# Altium PCB GALX4-0047N_PCB-1109N_REV-A.PcbDoc (part 2 of 2)
Units mil, origin at the board's own origin, x right, y up, seen from the top; angles counter-clockwise.
Board outline 3900 x 7750 mil, 2 copper layers (Top, Bottom), stack 64.8 mil thick; 240 components, 158 nets, 844 pads, 146 vias.
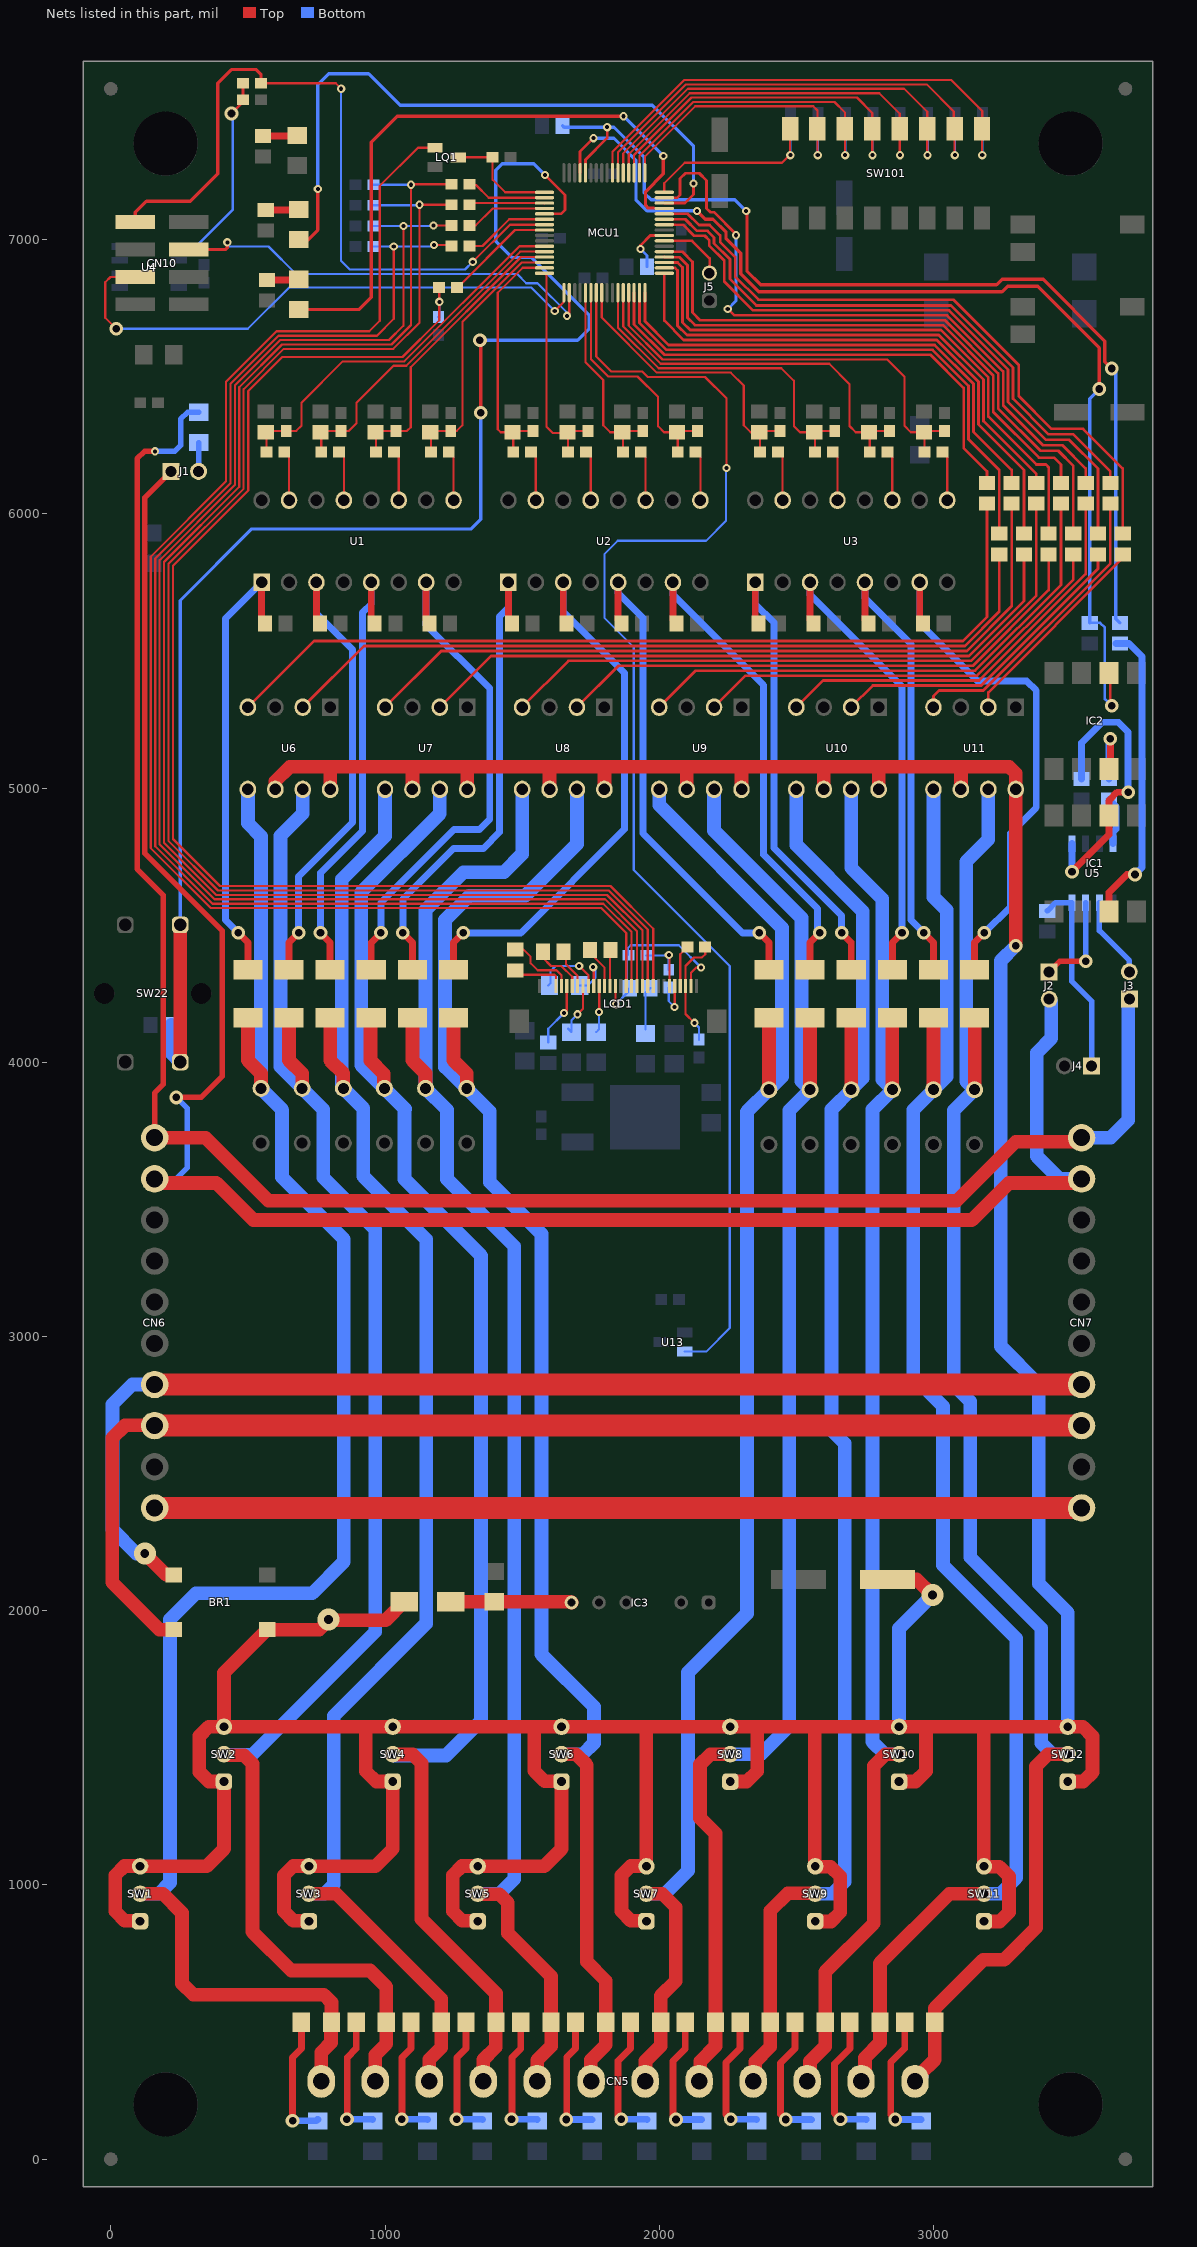
[diagram p2: the nets of this part, all layers, seen from the top]

## Via types
v1: diameter 30, hole 15, Top to Bottom, tented both sides, 81 vias
v2: diameter 50, hole 28, Top to Bottom, tented both sides, 59 vias
v3: diameter 80, hole 32, Top to Bottom, tented both sides, 6 vias

## Nets (pads, with @x,y where several pads share a name; then routed paths per layer and width w, separated by ;. In a path a pad name is that pad's centre, name@x,y a point inside that pad or via, vN(x,y) a via of type N, cw(c..) or ccw(c..) an arc to the next point about the centre after c; other vN are vias at no path point) (continued)
+24V: BR1.1 C25.1 D3.2 SW1.1 SW1.3 SW2.1 SW2.3 SW3.1 SW3.3 SW4.1 SW4.3 SW5.1 SW5.3 SW6.1 SW6.3 SW7.1 SW7.3 SW8.1 SW8.3 SW9.1 SW9.3 SW10.1 SW10.3 SW11.1 SW11.3 SW12.1 SW12.3 U6.6 U6.8 U7.6 U7.8 U8.6 U8.8 U9.6 U9.8 U10.6 U10.8 U11.6 U11.8 | length 19029.5
  Top w25: SW1.1@105.73,869.27 SW1.1@107,868 ; SW3.1@721.18,869.27 SW3.1@722.45,868 ; SW5.1@1336.64,869.27 SW5.1@1337.91,868 ; SW7.1@1952.09,869.27 SW7.1@1953.36,868 ; SW9.3@2568.82,1068 SW9.3@2570.09,1066.73 ; SW11.3@3184.27,1068 SW11.3@3185.54,1066.73
  Top w50: SW1.1@105.73,869.27 51,869.27 16,904.27 16,1035.55 49.73,1069.27 SW1.3@105.73,1069.27 ; SW1.3@107,1068 349,1068 412.73,1131.73 SW2.1@412.73,1377 358,1377 323,1412 323,1543.27 356.73,1577 SW2.3@412.73,1577 ; U6.6@600,4995 600,5025.06 652.94,5078 799,5078 ; SW3.1@721.18,869.27 666.45,869.27 631.45,904.27 631.45,1035.55 665.18,1069.27 SW3.3@721.18,1069.27 ; SW3.3@722.45,1068 964.45,1068 1028.18,1131.73 SW4.1@1028.18,1377 968,1377 930,1415 930,1577 ; U6.8@800,4995 800,5077 799,5078 ; D3.2@1070,2033 1002,1965 794,1965 760,1931 BR1.1@570,1931 412.73,1773.73 SW2.3@412.73,1577 ; U7.6@1100,4995 1100,5076 1098,5078 ; U7.8@1300,4995 1300,5074 1296,5078 ; SW5.1@1336.64,869.27 1281.91,869.27 1246.91,904.27 1246.91,1035.55 1280.64,1069.27 SW5.3@1336.64,1069.27 ; SW5.3@1337.91,1068 1579.91,1068 1643.64,1131.73 SW6.1@1643.64,1377 ; 1544.18,1573 1544.18,1416.27 1582.18,1378.27 SW6.1@1642.36,1378.27 ; U8.6@1600,4995 1600,5078 ; U8.8@1800,4995 1800,5077 1799,5078 ; SW7.1@1952.09,869.27 1897.36,869.27 1862.36,904.27 1862.36,1035.55 1896.09,1069.27 SW7.3@1952.09,1069.27 ; SW7.3@1952.09,1068 1952.09,1577 ; U9.6@2100,4995 2100,5074 2096,5078 ; SW8.1@2259.09,1377 2319.27,1377 2357.27,1415 2357.27,1571.73 ; U9.8@2300,4995 2300,5072 2294,5078 ; SW9.3@2567.54,1068 2567.54,1577 ; SW9.1@2570.09,866.73 2626.09,866.73 2659.82,900.45 2659.82,1031.73 2624.82,1066.73 SW9.3@2570.09,1066.73 ; U10.6@2600,4995 2600,5076 2598,5078 ; U10.8@2800,4995 2800,5077 2799,5078 ; C25.1@2832.5,2114 2939,2114 v3(2996,2057) ; SW10.1@2874.54,1377 2934.73,1377 2972.73,1415 2972.73,1571.73 ; U11.6@3099,4994 U11.6@3100,4995 3100,5074 3096,5078 ; SW11.3@3183,1068 3183,1574 ; SW11.1@3185.54,866.73 3241.54,866.73 3275.27,900.45 3275.27,1031.73 3240.27,1066.73 SW11.3@3185.54,1066.73 ; v2(3300,4425) U11.8@3300,4995 3300,5054 3276,5078 3096,5078 ; SW12.1@3490,1377 3546,1377 3579.73,1410.73 3579.73,1542 3544.73,1577 SW12.3@3490,1577 SW10.3@2874.54,1577 2567.54,1577 ; SW2.3@412.73,1577 930,1577 ; 799,5078 1098,5078 ; 930,1577 SW4.3@1028.18,1577 SW6.3@1643.64,1577 1952.09,1577 ; 1098,5078 1296,5078 ; 1296,5078 1600,5078 ; 1600,5078 1799,5078 ; 1799,5078 2096,5078 ; 1952.09,1577 SW8.3@2259.09,1577 2567.54,1577 ; 2096,5078 2294,5078 ; 2294,5078 2598,5078 ; 2598,5078 2799,5078 ; 2799,5078 3096,5078
  Bottom w50: SW10.3@2874.54,1577 2874.54,1935.54 v3(2996,2057) ; v2(3300,4425) 3245,4370 3245,2965 3384,2826 3384,2099 3490,1993 SW12.3@3490,1577
  other v3: 794,1968
CANH: CN6.9 CN7.9 J1.1 J2.2 | length 7261.3
  Top w20: J1.1@220,6155 124,6059 124,4762 406,4480 406,3949 329,3872 v2(239,3872)
  Top w50: CN6.9@145,3560 385,3560 520,3425 3140,3425 3275,3560 CN7.9@3530,3560
  Bottom w20: CN6.9@160,3575 238,3575 278,3615 278,3833 v2(239,3872)
  Bottom w50: J2.2@3422,4230 3430,4222 3430,4088 3377,4035 3377,3657 3459,3575 CN7.9@3540,3575
CANL: CN6.10 CN7.10 J3.1 R95.1 | length 7093.2
  Top w20: CN6.10@160,3725 160,3888 192,3920 192,4609 96,4705 96,6201 123,6228 v1(161,6228)
  Top w50: CN6.10@160,3725 345,3725 575,3495 3085,3495 3300,3710 3525,3710 CN7.10@3540,3725
  Bottom w20: v1@165,6232 v1(161,6228) 233,6228 255,6250 255,6345 281,6371 319,6371 R95.1@320,6370
  Bottom w50: CN7.10@3540,3725 3646,3725 3710,3789 J3.1@3710,4230
COMM_STAT: LED9.1 MCU1.45 | length 2293.2
  Top w10: 1980.51,7115 1981.15,7114.36 2017.72,7114.36 MCU1.45@2018.5,7113.58
  Top w12: LED9.1@685,6745 905,6745 950,6790 950,7355 1045,7450 v1(1870,7450) ; 1980.51,7115 1960,7115 1950,7125 1950,7175 2015,7240 v1(2015,7305)
  Bottom w12: v1(1870,7450) v1(2015,7305)
CRX: IC2.6 MCU1.61 R130.1 | length 3965.2
  Top w10: MCU1.61@1711.42,7243.5 1711.42,7321.42 v1(1760,7370) ; IC2.6@3640,5420 3645,5415 3645,5305 v2(3650,5300)
  Top w12: v1(2138,7104) 2168,7074 2196,7074 2243.5,7026.5 2243.5,7003.5 2297,6950 2297,6876 2363,6810 3250,6810 3270,6830 3380,6830 3605,6605 v2(3605,6455)
  Bottom w10: R130.1@3570,5602.5 3607.5,5602.5 3625,5585 3625,5325 v2(3650,5300)
  Bottom w12: v1(1760,7370) 1835,7370 1915,7290 1915,7145 1955,7105 v1@2138,7105 ; R130.1@3570,5602.5 3570,6420 v2(3605,6455)
CTX: MCU1.60 R129.1 R131.1 | length 3774.3
  Top w10: MCU1.60@1731.1,7243.5 1731.1,7291.1 1810,7370 v1(1810,7410)
  Top w12: v1(2317,7104) 2320,7101 2320,6885 2370,6835 3230,6835 3250,6855 3400,6855 3625,6630 3625,6555 v2(3650,6530)
  Bottom w12: R129.1@1647.5,7415 1652.5,7410 v1(1810,7410) 1835,7410 1945,7300 1945,7170 1970,7145 2276,7145 v1(2317,7104) ; v2(3650,6530) 3655,6530 3665,6520 3665,5617.5 R131.1@3680,5602.5
GND: CN6.1 CN7.1 | length 3380
  Top w80: CN6.1@160,2375 CN7.1@3540,2375
IN-L_1: C9.1 MCU1.11 R33.1 R41.1 | length 1420.2
  Top w8: R33.1@567.5,6225 567.5,6295 C9.1@565,6297.5 570,6302.5 R41.1@640,6302.5 676.5,6302.5 696,6322 696,6406 846,6556 1070.49,6556 1490.28,6975.79 MCU1.11@1581.5,6975.79
IN-L_2: C10.1 MCU1.12 R34.1 R42.1 | length 1196.2
  Top w8: R34.1@767.5,6225 C10.1@767.5,6295 ; C10.1@770,6302.5 R42.1@840,6302.5 868.5,6302.5 896,6330 896,6405 1031,6540 1077.12,6540 1493.22,6956.1 MCU1.12@1581.5,6956.1
IN-L_3: C11.1 MCU1.13 R35.1 R43.1 | length 1071.9
  Top w8: R35.1@967.5,6225 C11.1@967.5,6295 ; C11.1@970,6302.5 R43.1@1040,6302.5 1080.5,6302.5 1094,6316 1094,6534.25 1496.16,6936.42 MCU1.13@1581.5,6936.42
IN-L_4: C12.1 MCU1.14 R36.1 R44.1 | length 956.5
  Top w8: R36.1@1167.5,6225 C12.1@1167.5,6295 ; C12.1@1170,6302.5 R44.1@1240,6302.5 1261.5,6302.5 1282,6323 1282,6699.63 1499.1,6916.73 MCU1.14@1581.5,6916.73
IN-L_5: C38.1 MCU1.15 R104.1 R108.1 | length 904.6
  Top w8: C38.1@1465,6297.5 1421.5,6297.5 1411,6308 1411,6806 1502.05,6897.05 MCU1.15@1581.5,6897.05 ; R108.1@1467.5,6225 C38.1@1467.5,6295 ; C38.1@1470,6302.5 R104.1@1540,6302.5
IN-L_6: C39.1 MCU1.16 R105.1 R109.1 | length 790.5
  Top w8: MCU1.16@1581.5,6877.36 1589,6869.86 1589,6318 1612,6295 1667.5,6295 R109.1@1667.5,6225 ; C39.1@1670,6302.5 R105.1@1740,6302.5
IN-L_7: C40.1 MCU1.21 R106.1 R110.1 | length 729.9
  Top w8: MCU1.21@1731.1,6806.5 1731.1,6552.9 1796,6488 1796,6323 1821.5,6297.5 C40.1@1865,6297.5 ; R110.1@1867.5,6225 C40.1@1867.5,6295 ; C40.1@1870,6302.5 R106.1@1940,6302.5
IN-L_8: C41.1 MCU1.22 R107.1 R111.1 | length 869.7
  Top w8: MCU1.22@1750.79,6806.5 1750.79,6564.21 1814,6501 1921,6501 1996,6426 1996,6319 2017.5,6297.5 C41.1@2065,6297.5 ; R111.1@2067.5,6225 C41.1@2067.5,6295 ; C41.1@2070,6302.5 R107.1@2140,6302.5
IN-L_9: C13.1 MCU1.24 R37.1 R45.1 | length 1063.7
  Top w8: MCU1.24@1790,6806.34 MCU1.24@1790.16,6806.5 1790.16,6716.22 1991.37,6515 2261,6515 2308,6468 2308,6323 2333.5,6297.5 C13.1@2365,6297.5 ; R37.1@2367.5,6225 C13.1@2367.5,6295 ; C13.1@2370,6302.5 R45.1@2440,6302.5
IN-L_10: C14.1 MCU1.27 R38.1 R46.1 | length 1237.5
  Top w8: MCU1.27@1849.21,6806.5 1849.21,6679.79 1998,6531 2445,6531 2491,6485 2491,6320 2513.5,6297.5 C14.1@2565,6297.5 ; R38.1@2567.5,6225 C14.1@2567.5,6295 ; C14.1@2570,6302.5 R46.1@2640,6302.5
IN-L_11: C15.1 MCU1.28 R39.1 R47.1 | length 1408.6
  Top w8: MCU1.28@1868.9,6806.5 1868.9,6683.47 2005.37,6547 2620,6547 2694,6473 2694,6320 2716.5,6297.5 C15.1@2765,6297.5 ; R39.1@2767.5,6225 C15.1@2767.5,6295 ; C15.1@2770,6302.5 R47.1@2840,6302.5
IN-L_12: C16.1 MCU1.29 R40.1 R48.1 | length 1602.4
  Top w8: MCU1.29@1888.58,6806.5 1888.58,6686.42 2012,6563 2831,6563 2894,6500 2894,6321 2917.5,6297.5 C16.1@2965,6297.5 ; R40.1@2967.5,6225 C16.1@2967.5,6295 ; C16.1@2970,6302.5 R48.1@3040,6302.5
IO_1: CN5.1 IO1.1 MOV1.1 R1.1 SW1.2 U6.5 | length 6356.1
  Top w50: SW1.2@107,968 190,968 260,898 260,641 301,600 777,600 805,572 IO1.1@805,499 803,497 803,425 767.32,389.32 CN5.1@767.32,284 ; R1.1@500,4162.5 500,4007 548,3959 MOV1.1@548,3905
  Bottom w50: SW1.2@107,968 175,968 216,1009 216,1969 311,2064 735,2064 850,2179 850,3355 624,3581 624,3825 ; U6.5@500,4995 500,4872 548,4824 MOV1.1@548,3905 623,3830
IO_2: CN5.2 IO2.1 MOV2.1 R2.1 SW2.2 U6.7 | length 5927.6
  Top w50: SW2.2@412.73,1477 416.73,1473 486,1473 517,1442 517,829 658,688 945,688 1005,628 IO2.1@1005,499 1005,421 964.17,380.17 CN5.2@964.17,284 ; R2.1@650,4162.5 650,4007 698,3959 MOV2.1@698,3905
  Bottom w50: SW2.2@412.73,1477 414.73,1475 516,1475 964.17,1923.17 964.17,3390.83 775,3580 775,3828 MOV2.1@698,3905 619,3984 619,4826 700,4907 U6.7@700,4995
IO_3: CN5.3 IO3.1 MOV3.1 R3.1 SW3.2 U7.5 | length 5665.5
  Top w50: SW3.2@722.45,968 822,968 1205,585 IO3.1@1205,499 1205,407.3 1161.02,363.32 CN5.3@1161.02,284 ; R3.1@800,4162.5 800,4007 848,3959 MOV3.1@848,3905
  Bottom w50: SW3.2@722.45,968 779,968 813,1002 813,1616 1150,1953 1150,3355 921,3584 921,3832 MOV3.1@848,3905 ; MOV3.1@842,3905 842,4667 1000,4825 U7.5@1000,4995
IO_4: CN5.4 IO4.1 MOV4.1 R4.1 SW4.2 U7.7 | length 5756.3
  Top w50: R4.1@947,4161.5 947,4006 995,3958 MOV4.1@995,3904 ; SW4.2@1028.18,1477 1029.18,1476 1101,1476 1133,1444 1133,876 1405,604 IO4.1@1405,499 1403.68,497.68 1403.68,408 1357.88,362.2 CN5.4@1357.88,284
  Bottom w50: SW4.2@1028.18,1477 1033.18,1472 1223,1472 1350,1599 1350,3295 1071,3574 1071,3825 ; 1073,3830 MOV4.1@998,3905 913,3990 913,4620 1200,4907 U7.7@1200,4995
IO_5: CN5.5 IO5.1 MOV5.1 R116.1 SW5.2 U8.5 | length 5640.3
  Top w25: CN5.5@1567,277 CN5.5@1567,284
  Top w50: R116.1@1100,4162.5 1100,4007 1148,3959 MOV5.1@1148,3905 ; SW5.2@1337.91,968 1339.91,966 1417,966 1448,935 1448,824 1605,667 IO5.1@1605,499 1605.68,498.32 1605.68,412 1554.73,361.05 CN5.5@1554.73,284
  Bottom w50: SW5.2@1337.91,968 1417,968 1471,1022 1471,3329 1226,3574 1226,3827 MOV5.1@1148,3905 1148,4555 1286,4693 1434,4693 1500,4759 U8.5@1500,4995
IO_6: CN5.6 IO6.1 MOV6.1 R117.1 SW6.2 U8.7 | length 5721.8
  Top w50: R117.1@1250,4162.5 1250,4007 1298,3959 MOV6.1@1298,3905 ; SW6.2@1643.64,1477 1696,1477 1736,1437 1736,720 1805,651 IO6.1@1805,499 1805,417 1750,362 CN5.6@1750,308.5
  Bottom w50: 1219,3983 1219,4519 1307,4607 1511,4607 1700,4796 U8.7@1700,4995 ; 1220,3983 MOV6.1@1298,3905 1382,3821 1382,3563 1571,3374 1571,1841 1762,1650 1762,1518 1721,1477 SW6.2@1643.64,1477
IO_7: CN5.7 IO7.1 MOV7.1 R118.1 SW7.2 U9.5 | length 5502.1
  Top w50: CN5.7@1950,309 1950,358 2005,413 IO7.1@2005,499 2005,595 2060,650 2060,919 2011,968 SW7.2@1953.36,968 ; MOV7.1@2400,3900 R118.1@2400,4162.5
  Bottom w50: SW7.2@1953.36,968 2021,968 2105,1052 2105,1775 2320,1990 2320,3820 MOV7.1@2400,3900 2448,3948 2448,4490 2000,4938 U9.5@2000,4995
IO_8: CN5.8 IO8.1 MOV8.1 R119.1 SW8.2 U9.7 | length 5413.8
  Top w50: CN5.8@2150,308.5 2150,357.5 2205,412.5 IO8.1@2205,499 2205,1188 2149,1244 2149,1439 2187,1477 SW8.2@2259.09,1477 ; MOV8.1@2550,3900 R119.1@2550,4162.5
  Bottom w50: U9.7@2200,4995 2200,4845.02 2519,4526.02 2519,3931 MOV8.1@2550,3900 2474,3824 2474,1580 2371,1477 SW8.2@2259.09,1477
IO_9: CN5.9 IO9.1 MOV9.1 R5.1 SW9.2 U10.5 | length 5369.4
  Top w25: SW9.2@2548,970 SW9.2@2566.82,970
  Top w50: CN5.9@2350,309 2350,355 2405,410 IO9.1@2405,499 2405,906 2469,970 SW9.2@2548,970 ; MOV9.1@2700,3900 R5.1@2700,4162.5
  Bottom w50: U10.5@2500,4972 U10.5@2500,4995 2500,4792 2742,4550 2742,3942 MOV9.1@2700,3900 2628,3828 2628,2659 2676,2611 2676,1012 2632,968 SW9.2@2568.82,968
IO_10: CN5.10 IO10.1 MOV10.1 R6.1 SW10.2 U10.7 | length 5274.6
  Top w50: CN5.10@2550,308.5 2550,356 2605,411 IO10.1@2605,499 2605,683 2782,860 2782,1434 2825,1477 SW10.2@2874.54,1477 ; MOV10.1@2850,3900 R6.1@2850,4162.5
  Bottom w50: U10.7@2700,4995 2700,4709 2813,4596 2813,3937 MOV10.1@2850,3900 2778,3828 2778,1522 2823,1477 SW10.2@2874.54,1477
IO_11: CN5.11 IO11.1 MOV11.1 R7.1 SW11.2 U11.5 | length 5512.3
  Top w50: CN5.11@2750,309 2750,370 2805,425 IO11.1@2805,499 2805,715 3058,968 SW11.2@3184.27,968 ; MOV11.1@3000,3900 R7.1@3000,4162.5
  Bottom w50: U11.5@3000,4995 3000,4603 3048,4555 3048,3948 MOV11.1@3000,3900 2926,3826 2926,2855 3035,2746 3035,2166 3302,1899 3302,1026 3244,968 SW11.2@3184.27,968
IO_12: CN5.12 IO12.1 MOV12.1 R8.1 SW12.2 U11.7 | length 5551.2
  Top w50: CN5.12@2950,308.5 3005,363.5 IO12.1@3005,499 3005,551 3181,727 3257,727 3374,844 3374,1433 3418,1477 SW12.2@3490,1477 ; MOV12.1@3150,3900 R8.1@3150,4162.5
  Bottom w50: CN5.12@2949.75,308.25 CN5.12@2956,302 ; U11.7@3200,4995 3200,4812.5 3119,4731.5 3119,3931 MOV12.1@3150,3900 3074,3824 3074,2823 3134,2763 3134,2195 3393,1936 3393,1518 3434,1477 SW12.2@3490,1477
LCD-BUSY: LQ1.2 LR7.1 MCU1.1 | length 414.5
  Top w8: LQ1.2@1267.5,7300 LR7.1@1392.5,7300 1392.5,7218.5 1438.36,7172.64 MCU1.1@1581.5,7172.64
LCD-C\S\1\: LCD1.21 LR3.1 R128.2 | length 5317.9
  Top w8: R128.2@1240.5,7129 R128.2@1242.5,7127 v1(1126,7127) 1126,6697 1030.57,6601.57 631.14,6601.57 484.43,6454.86 484.43,6091.86 210,5817.44 210,4807.56 391.14,4626.43 1815.95,4626.43 1958.27,4484.1 LCD1.21@1958.27,4270
  Bottom w8: LR3.1@957.5,7125 1124,7125 v1(1126,7127)
LCD-CLK: LCD1.19 LR5.1 R124.1 | length 5220.8
  Top w8: v1(1067,7050) 1067,6686 1014.57,6633.57 617.88,6633.57 452.43,6468.12 452.43,6105.12 178,5830.69 178,4794.31 377.88,4594.43 1802.69,4594.43 1918.9,4478.22 LCD1.19@1918.9,4270 ; v1@1178,7052 R124.1@1242.5,7052
  Bottom w8: LR5.1@957.5,7050 v1(1067,7050) 1176,7050 v1(1177,7051)
LCD-D/C\: LCD1.22 LR2.1 R126.1 | length 4835
  Top w8: v1@1197.5,6769.5 R126.1@1197.5,6825 ; v1(1198,6773) 1198,6769 1198,6706.14 1063.86,6572 625,6572 501,6448 501,6085 226.57,5810.57 226.57,4814.43 398,4643 1822,4643 1977.95,4487.05 LCD1.22@1977.95,4270
  Top w10: v1@1197.5,6769.5 v1@1198,6769
  Bottom w8: LR2.1@1198,6720.5 v1(1198,6773)
  Bottom w10: LR2.1@1195,6717.5 LR2.1@1198,6720.5
LCD-R\S\T\: LCD1.20 LR4.1 R127.2 | length 5380.3
  Top w8: R127.2@1242.5,7202 1097,7202 v1(1095,7200) 1095,6688.63 1023.95,6617.57 624.51,6617.57 468.43,6461.49 468.43,6098.49 194,5824.07 194,4800.93 384.51,4610.43 1809.32,4610.43 1938.58,4481.16 LCD1.20@1938.58,4270
  Bottom w8: LR4.1@957.5,7200 v1(1095,7200)
LCD-SDA: LCD1.18 LR6.1 R125.1 | length 5118.4
  Top w8: v1(1032,6975) 1032,6711 970.57,6649.57 611.25,6649.57 436.43,6474.75 436.43,6111.75 162,5837.32 162,4787.68 371.25,4578.43 1796.06,4578.43 1899.21,4475.28 LCD1.18@1899.21,4270 ; v1(1179,6980) 1239.5,6980 R125.1@1242.5,6977
  Bottom w8: LR6.1@957.5,6975 v1(1032,6975) 1174,6975 v1(1179,6980)
MCU_STAT: LED10.1 MCU1.46 | length 2405.5
  Top w10: MCU1.46@2018.5,7133.27 2093.27,7133.27 2125,7165 v1(2125,7205)
  Top w12: LED10.1@685,7000 720,7000 755,7035 v1(755,7185)
  Bottom w12: v1(755,7185) 755,7565 795,7605 940,7605 1055,7490 1975,7490 2125,7340 v1(2125,7205)
NetBR1_3: BR1.3 CN6.4 CN7.4 | length 4313.2
  Top w50: v3(124,2209) 202,2131 BR1.3@230,2131
  Top w80: CN6.4@160,2825 CN7.4@3540,2825
  Bottom w50: v3(124,2209) 93,2209 6,2296 6,2753 78,2825 CN6.4@160,2825
NetBR1_4: BR1.4 CN6.3 CN7.3 | length 4376.5
  Top w50: CN6.3@160,2675 159,2676 52,2676 5,2629 5,2104 178,1931 BR1.4@230,1931
  Top w80: CN6.3@160,2675 CN7.3@3540,2675
NetC53_2: C53.2 D3.1 IC3.6 | length 441.2
  Top w50: D3.1@1240,2033 C53.2@1398,2033 1677,2033 IC3.6@1680,2030
NetIC1_3: IC1.3 R131.2 | length 1112
  Top w25: IC1.3@3640,4550 3640,4620 3705,4685 v2(3735,4685)
  Bottom w25: R131.2@3665,5527.5 R131.2@3680,5527.5 3712.5,5527.5 3760,5480 3760,4710 v2(3735,4685)
NetIC1_6: IC1.6 R132.1 U5.1 | length 1068.9
  Top w25: v2(3505,4695) 3640,4830 IC1.6@3640,4900 3640,4955 3670,4985 v2(3710,4985)
  Bottom w25: v2(3505,4695) U5.1@3505,4797.5 ; R132.1@3540,5032.5 3540,5165 3615,5240 3675,5240 3710,5205 v2(3710,4985)
NetIC2_3: IC2.3 R133.1 | length 261.6
  Top w25: IC2.3@3640,5070 3645,5075 v2(3645,5180)
  Bottom w25: R133.1@3640,5032.5 3640,5175 v2(3645,5180)
NetIO1_2: IO1.2 R65.1 | length 474.6
  Top w25: v2(663,140) 667.5,140 668.5,141 662.5,147 662.5,371.5 695,404 IO1.2@695,499
  Bottom w25: v2(663,140) 748.5,140 754,145.5 R65.1@755,144.5
NetIO2_2: IO2.2 R66.1 | length 462
  Top w25: v2(861,145.5) 862.5,147 862.5,371.5 895,404 IO2.2@895,499
  Bottom w25: v2(861,145.5) 954,145.5 R66.1@955,144.5
NetIO3_2: IO3.2 R67.1 | length 462
  Top w25: v2(1061,145.5) 1062.5,147 1062.5,371.5 1095,404 IO3.2@1095,499
  Bottom w25: v2(1061,145.5) 1154,145.5 R67.1@1155,144.5
NetIO4_2: IO4.2 R68.1 | length 462
  Top w25: v2(1261,145.5) 1262.5,147 1262.5,371.5 1295,404 IO4.2@1295,499
  Bottom w25: v2(1261,145.5) 1354,145.5 R68.1@1355,144.5
NetIO5_2: IO5.2 R69.1 | length 462
  Top w25: v2(1461,145.5) 1462.5,147 1462.5,371.5 1495,404 IO5.2@1495,499
  Bottom w25: v2(1461,145.5) 1554,145.5 R69.1@1555,144.5
NetIO6_2: IO6.2 R70.1 | length 462.5
  Top w25: v2(1661,145) 1662.5,146.5 1662.5,371 1695,403.5 IO6.2@1695,499
  Bottom w25: v2(1661,145) 1754,145 R70.1@1755,144
NetIO7_2: IO7.2 R71.1 | length 471.1
  Top w25: v2(1861,145.5) 1850,156.5 1850,359 1895,404 IO7.2@1895,499
  Bottom w25: v2(1861,145.5) 1954,145.5 R71.1@1955,144.5
NetIO8_2: IO8.2 R72.1 | length 525.7
  Top w25: 2050,258 2050,310 ; v2@2062.5,146.5 v2(2061,145) 2050,156 2050,310 ; IO8.2@2095,499 2095,403.5 2050,358.5 2050,310
  Bottom w25: v2(2061,145) 2154,145 R72.1@2155,144
NetIO9_2: IO9.2 R100.1 | length 478.2
  Top w25: v2@2262.5,147 v2(2261,145.5) 2244,162.5 2244,353 2295,404 IO9.2@2295,499
  Bottom w25: v2(2261,145.5) 2354,145.5 R100.1@2355,144.5
NetIO10_2: IO10.2 R101.1 | length 480.4
  Top w25: v2@2462.5,146.5 v2(2461,145) 2442,164 2442,350.5 2495,403.5 IO10.2@2495,499
  Bottom w25: v2(2461,145) 2554,145 R101.1@2555,144
NetIO11_2: IO11.2 R102.1 | length 482.3
  Top w25: v2@2662.5,147 v2(2661,145.5) 2639,167.5 2639,348 2695,404 IO11.2@2695,499
  Bottom w25: v2(2661,145.5) 2754,145.5 R102.1@2755,144.5
NetIO12_2: IO12.2 R103.1 | length 478.7
  Top w25: v2@2862.5,146.5 v2(2861,145) 2844,162 2844,352.5 2895,403.5 IO12.2@2895,499
  Bottom w25: v2(2861,145) 2954,145 R103.1@2955,144
NetJ1_2: J1.2 R95.2 | length 105
  Bottom w20: J1.2@320,6155 R95.2@320,6260
NetJ2_1: J2.1 U5.7 | length 363.2
  Top w20: J2.1@3422,4330 3460,4368 v2(3555,4368)
  Bottom w20: v2(3555,4368) U5.7@3555,4582.5
NetJ3_2: J3.2 U5.6 | length 297.6
  Bottom w20: U5.6@3605,4582.5 3605,4480 3714,4371 J3.2@3714,4330
NetJ4_1: J4.1 R27.1 U5.8 | length 727.7
  Bottom w20: R27.1@3415,4552.5 3445,4582.5 U5.8@3505,4582.5 3505,4295 3577,4223 J4.1@3577,3987
NetJ5_2: J5.2 MCU1.39 | length 245.6
  Top w10: MCU1.39@2018.5,6995.47 2119.53,6995.47 2184,6931 2184,6879 J5.2@2183,6878
NetLC1_1: LC1.1 LR1.2 | length 157.2
  Bottom w8: LC1.1@1950,4120 1950,4252.5 LR1.2@1967.5,4270
NetLC2_1: LC2.1 LC3.2 LCD1.25 | length 260.3
  Top w8: v1(2035,4391) 2037.01,4388.99 LCD1.25@2037.01,4267.98
  Bottom w8: LC2.1@1952.5,4390 2034,4390 v1(2035,4391) LC3.2@2035,4337.5
NetLC2_2: LC2.2 LCD1.15 LCD1.29 LR1.1 | length 689.9
  Top w8: LCD1.15@1840.16,4267.98 1840.16,4213.84 v1(1842,4212) ; LCD1.29@2115.75,4267.98 LCD1.29@2115.75,4277.98 2115.75,4326.75 2135,4346 v1(2152,4346)
  Bottom w8: v1(1842,4212) 1886.4,4256.4 1886.4,4267.98 1882.5,4271.87 1882.5,4390 1885,4392.5 1885,4416 1896,4427 2071,4427 v1(2152,4346)
NetLC3_1: LC3.1 LCD1.26 | length 145.5
  Top w8: v1(2056,4202) 2056.69,4202.69 LCD1.26@2056.69,4267.98
  Bottom w8: LC3.1@2035,4272.5 2035,4223 v1(2056,4202)
NetLC4_1: LC4.1 LC5.1 LCD1.28 | length 404.1
  Top w8: v1(2128.1,4143.9) 2096.06,4175.94 LCD1.28@2096.06,4277.98 2096.06,4351.06 2127,4382 2155.5,4382 2167.5,4394 LC4.1@2167.5,4420
  Bottom w8: v1(2128.1,4143.9) 2145,4127 LC5.1@2145,4082.5
NetLC4_2: LC4.2 LCD1.27 | length 162.8
  Top w8: LCD1.27@2076.38,4267.98 LCD1.27@2076.38,4277.98 2076.38,4393.88 LC4.2@2102.5,4420
NetLC7_1: LC7.1 LCD1.14 | length 117.9
  Top w8: LCD1.14@1820.47,4267.98 1820.47,4382.97 LC7.1@1822.5,4385
NetLC7_2: LC7.2 LCD1.13 | length 136.3
  Top w8: LC7.2@1759,4387 1800.79,4345.21 LCD1.13@1800.79,4267.98
NetLC8_1: LC8.1 LCD1.12 | length 172.6
  Top w8: v1(1780,4183) 1781.1,4184.1 LCD1.12@1781.1,4277.98
  Bottom w8: LC8.1@1770,4110 1780,4120 v1(1780,4183)
NetLC9_1: LC9.1 LCD1.11 | length 221.2
  Top w8: v1(1759,4347) 1761.42,4344.58 LCD1.11@1761.42,4277.98 ; LCD1.11@1761.42,4267.98 LCD1.11@1761.42,4277.98 ; 1761.42,4307.42 LCD1.11@1761.42,4277.98
  Bottom w8: LC9.1@1710,4280 1739,4280 1768,4309 1768,4338 v1(1759,4347)
NetLC9_2: LC9.2 LCD1.10 | length 287.5
  Top w8: v1(1708,4351) 1741.73,4317.27 LCD1.10@1741.73,4277.98 ; LCD1.10@1741.73,4267.98 LCD1.10@1741.73,4277.98 ; LCD1.10@1741.73,4300.27 LCD1.10@1741.73,4277.98
  Bottom w8: LC9.2@1595,4280 1603,4288 1603,4332 1622,4351 v1(1708,4351)
NetLC10_1: LC10.1 LCD1.8 | length 134.4
  Top w8: LC10.1@1660.5,4385 1660.5,4356.5 1702.36,4314.64 LCD1.8@1702.36,4277.98 LCD1.8@1702.36,4267.98
NetLC10_2: LC10.2 LCD1.7 | length 182.9
  Top w8: LC10.2@1573,4383 1573.5,4383 1605,4351.5 1642.87,4351.5 1682.68,4311.7 LCD1.7@1682.68,4277.98 LCD1.7@1682.68,4267.98
NetLC11_1: LC11.1 LCD1.9 | length 193.8
  Top w8: v1(1702,4175) 1722.05,4195.05 LCD1.9@1722.05,4267.98
  Bottom w8: LC11.1@1667,4123 LC11.1@1680,4110 1680,4153 v1(1702,4175)
NetLC12_1: LC12.1 LCD1.5 | length 278.7
  Top w8: LC12.1@1475,4410.5 1505.5,4410.5 1531,4385 1531,4361 1556.5,4335.5 1625,4335.5 1643.31,4317.19 LCD1.5@1643.31,4277.98 LCD1.5@1643.31,4267.98 ; LC12.1@1485,4392.5 LC12.1@1493.5,4392.5
NetLC12_2: LC12.2 LCD1.4 | length 224.1
  Top w8: LC12.2@1475,4335.5 1491,4319.5 1618.37,4319.5 1623.62,4314.25 LCD1.4@1623.62,4277.98 ; LCD1.4@1623.62,4267.98 LCD1.4@1623.62,4277.98 ; LCD1.4@1623.62,4298.38 LCD1.4@1623.62,4277.98
NetLC13_1: LC13.1 LCD1.6 | length 233.6
  Top w8: v1(1653,4180) 1662.99,4189.99 LCD1.6@1662.99,4277.98
  Bottom w8: LC13.1@1595,4072.5 1595,4122 v1(1653,4180)
NetLCD1_17: LCD1.17 LQ1.1 | length 5281.1
  Top w8: LQ1.1@1182.5,7335 1120,7335 981,7196 981,6704 942.57,6665.57 604.63,6665.57 420.43,6481.37 420.43,6118.37 146,5843.95 146,4781.05 364.63,4562.43 1788.57,4562.43 1879.53,4471.47 LCD1.17@1879.53,4277.98 LCD1.17@1879.53,4270
NetLED9_2: LED9.2 R92.1 | length 116
  Top w25: R92.1@570,6852.5 682.5,6852.5 LED9.2@685,6855
NetLED10_2: LED10.2 R93.1 | length 117.5
  Top w25: R93.1@565,7107.5 LED10.2@682.5,7107.5
NetLED11_2: LED11.2 R94.2 | length 126
  Top w20: LED11.2@677.5,7377.5 LED11.2@680,7380
  Top w25: R94.2@555,7377.5 LED11.2@677.5,7377.5
NetMCU1_2: MCU1.2 R127.1 | length 296.8
  Top w8: R127.1@1307.5,7202 1310.5,7199 1332,7199 1378.05,7152.95 MCU1.2@1581.5,7152.95 MCU1.2@1579.72,7154.73
NetMCU1_3: MCU1.3 R128.1 | length 279.1
  Top w8: R128.1@1307.5,7127 1313.77,7133.27 MCU1.3@1581.5,7133.27 MCU1.3@1579.72,7131.49
NetMCU1_4: MCU1.4 R124.2 | length 302
  Top w8: R124.2@1307.5,7052 1331,7052 1392.58,7113.58 MCU1.4@1581.5,7113.58 MCU1.4@1579.72,7111.8
NetMCU1_5: MCU1.5 R134.1 SW22.1 SW22.2 | length 5324.1
  Top w10: MCU1.5@1581.5,7093.9 1641.9,7093.9 1656,7108 1656,7163 v1(1583,7236)
  Top w12: v2(1346,6633) 1349,6630 v2(1349,6369)
  Top w50: SW22.1@253,4001 SW22.2@253,4501
  Bottom w12: SW22.2@253,4501 253,5684 514,5945 1314,5945 1349,5980 v2(1349,6369) ; v2(1346,6633) 1702,6633 1744,6675 1744,6724 1533,6935 1463,6935 1404,6994 1404,7253 1428,7277 1542,7277 v1(1583,7236)
  Bottom w50: R134.1@220.5,4136 220.5,4033.5 SW22.1@253,4001
NetMCU1_6: MCU1.6 R125.2 | length 314.3
  Top w8: R125.2@1307.5,6977 1355.37,6977 1452.59,7074.21 MCU1.6@1581.5,7074.21
NetMCU1_8: MCU1.8 R126.2 | length 405.9
  Top w8: R126.2@1262.5,6825 1264.18,6825 1474.03,7034.84 MCU1.8@1581.5,7034.84
NetMCU1_23: MCU1.23 U13.3 | length 4923
  Top w8: MCU1.23@1770.47,6806.5 1770.47,6573.53 1825,6519 1938,6519 1958,6499 2167,6499 2245,6421 v1(2245,6167)
  Bottom w8: U13.3@2092.5,2945 2171,2945 2257,3031 2257,4351 1907,4701 1907,5514 1800,5621 1800,5853 1849,5902 2171,5902 2243,5974 2243,6165 v1(2245,6167)
NetMCU1_40: MCU1.40 R135.1 | length 191.2
  Top w10: v1@1931,6965 1931,6979 1967.16,7015.16 MCU1.40@2018.5,7015.16
  Bottom w10: v1(1932,6966) 1955.5,6942.5 R135.1@1955.5,6901
NetR1_2: R1.2 R17.1 U1.1 | length 1656.3
  Top w25: v2(465,4472) 500,4437 R1.2@500,4337.5 ; U1.1@550,5750 550,5612.5 R17.1@562.5,5600
  Bottom w25: v2(465,4472) 418,4519 418,5618 U1.1@550,5750
NetR2_2: R2.2 R18.1 U1.3 | length 1700.8
  Top w25: R2.2@650,4337.5 650,4437 v2(685,4472) ; R18.1@750,5612.5 U1.3@750,5750
  Bottom w25: v2(685,4472) 685,4677 882,4874 882,5505 750,5637 U1.3@750,5750
NetR3_2: R3.2 R19.1 U1.5 | length 1651.5
  Top w25: v2(765,4472) 800,4437 R3.2@800,4337.5 ; R19.1@950,5612.5 U1.5@950,5750
  Bottom w25: v2(765,4472) 765,4691 918,4844 918,5640 950,5672 U1.5@950,5750 950,5759 U1.5@949,5760
NetR4_2: R4.2 R20.1 U1.7 | length 1878.9
  Top w25: R4.2@950,4337.5 950,4437 v2(985,4472) ; R20.1@1150,5612.5 U1.7@1150,5750
  Bottom w25: v2(985,4472) 985,4582 1252,4849 1344,4849 1382,4887 1382,5363 1150,5595 U1.7@1150,5750
NetR5_2: R5.2 R21.1 U3.1 | length 1695
  Top w25: R21.1@2350,5612.5 U3.1@2350,5750 ; v2(2665,4472) 2700,4437 R5.2@2700,4337.5
  Bottom w25: U3.1@2350,5750 2350,5672 2418,5604 2418,4782 2665,4535 v2(2665,4472)
NetR6_2: R6.2 R22.1 U3.3 | length 1704.7
  Top w25: R22.1@2550,5612.5 U3.3@2550,5750 ; R6.2@2850,4337.5 2850,4437 v2(2885,4472)
  Bottom w25: U3.3@2549,5749 U3.3@2550,5750 2550,5705 2885,5370 v2(2885,4472)
NetR7_2: R7.2 R23.1 U3.5 | length 1653.6
  Top w25: R23.1@2750,5612.5 U3.5@2750,5750 ; v2(2965,4472) 3000,4437 R7.2@3000,4337.5
  Bottom w25: U3.5@2750,5750 2750,5694 2918,5526 2918,4519 v2(2965,4472)
NetR8_2: R8.2 R24.1 U3.7 | length 1924.7
  Top w25: R24.1@2950,5612.5 U3.7@2950,5750 ; R8.2@3150,4337.5 3150,4437 v2(3185,4472)
  Bottom w25: U3.7@2950,5750 2950,5600 3160,5390 3340,5390 3375,5355 3375,4930 3280,4835 3280,4567 v2(3185,4472)
NetR30_2: R30.2 U10.4 | length 1513.2
  Top w10: U10.4@2500,5295 2597,5392 3166.65,5392 3555,5780.35 R30.2@3555,6037.5
NetR31_2: R31.2 U10.2 | length 1161.7
  Top w10: U10.2@2700,5295 2779,5374 3174.1,5374 3600,5799.9 R31.2@3600,5852.5
NetR32_2: R32.2 U11.4 | length 1104.3
  Top w10: U11.4@3000,5295 3000,5336 3020,5356 3181.56,5356 3645,5819.44 R32.2@3645,6037.5
NetR33_2: R33.2 U1.15 | length 182.2
  Top w8: R33.2@632.5,6225 650,6207.5 U1.15@650,6050
NetR34_2: R34.2 U1.13 | length 157.5
  Top w8: U1.13@850,6050 R34.2@850,6207.5
NetR35_2: R35.2 U1.11 | length 157.5
  Top w8: U1.11@1050,6050 R35.2@1050,6207.5
NetR36_2: R36.2 U1.9 | length 157.5
  Top w8: U1.9@1250,6050 R36.2@1250,6207.5
NetR37_2: R37.2 U3.15 | length 157.5
  Top w8: U3.15@2450,6050 R37.2@2450,6207.5
NetR38_2: R38.2 U3.13 | length 157.5
  Top w8: U3.13@2650,6050 R38.2@2650,6207.5
NetR39_2: R39.2 U3.11 | length 157.5
  Top w8: U3.11@2850,6050 R39.2@2850,6207.5
NetR40_2: R40.2 U3.9 | length 157.5
  Top w8: U3.9@3050,6050 R40.2@3050,6207.5
NetR77_2: R77.2 U11.2 | length 786.5
  Top w10: U11.2@3200,5321 U11.2@3200,5295 3200,5348.99 3690,5838.99 R77.2@3690,5852.5
NetR81_2: R81.2 U6.4 | length 3244.8
  Top w10: U6.4@500,5295 741,5536 3107,5536 3195,5624 R81.2@3195,6037.5
NetR82_2: R82.2 U6.2 | length 2893.3
  Top w10: U6.2@700,5295 923,5518 3114.46,5518 3240,5643.54 R82.2@3240,5852.5
NetR83_2: R83.2 U7.4 | length 2811.9
  Top w10: U7.4@1000,5295 1205,5500 3121.91,5500 3285,5663.09 R83.2@3285,6037.5
NetR84_2: R84.2 U7.2 | length 2526.4
  Top w10: U7.2@1200,5295 1387,5482 3000,5482 ; 2934,5482 3000,5482 ; R84.2@3330,5852.5 3330,5682.63 3129.37,5482 3000,5482
NetR85_2: R85.2 U8.4 | length 2374
  Top w10: U8.4@1500,5295 1669,5464 3136.82,5464 3375,5702.18 R85.2@3375,6032.5
NetR86_2: R86.2 U8.2 | length 2027.5
  Top w10: U8.2@1700,5295 1851,5446 3144.28,5446 3420,5721.72 R86.2@3420,5852.5
NetR87_2: R87.2 U9.4 | length 1946.1
  Top w10: U9.4@2000,5295 2133,5428 3151.73,5428 3465,5741.27 R87.2@3465,6037.5
NetR88_2: R88.2 U9.2 | length 1594.6
  Top w10: U9.2@2200,5295 2315,5410 3159.19,5410 3510,5760.81 R88.2@3510,5852.5
NetR89_1: R89.1 R90.2 U4.1 | length 758.1
  Top w10: v2@455,7450 440,7450 v2(440,7460) 482.5,7502.5 R89.1@482.5,7510 R90.2@482.5,7570
  Bottom w10: U4.1@247.5,6975 310,6975 445,7110 445,7455 v2(440,7460)
NetR108_2: R108.2 U2.15 | length 157.5
  Top w8: U2.15@1550,6050 R108.2@1550,6207.5
NetR109_2: R109.2 U2.13 | length 157.5
  Top w8: U2.13@1750,6050 R109.2@1750,6207.5
NetR110_2: R110.2 U2.11 | length 157.5
  Top w8: U2.11@1950,6050 R110.2@1950,6207.5
NetR111_2: R111.2 U2.9 | length 157.5
  Top w8: U2.9@2150,6050 R111.2@2150,6207.5
NetR112_1: R112.1 R116.2 U2.1 | length 1809.8
  Top w25: v2(1065,4472) 1100,4437 R116.2@1100,4337.5 ; R112.1@1450,5612.5 U2.1@1450,5750
  Bottom w25: v2(1065,4472) 1065,4595 1250,4780 1359,4780 1418,4839 1418,4953 ; 1418,4934 1418,4953 ; 1450,5655 1450,5658 ; U2.1@1450,5750 1450,5658 ; 1418,4953 1418,5626 1450,5658
NetR113_1: R113.1 R117.2 U2.3 | length 2031.9
  Top w25: R117.2@1250,4337.5 1250,4437 v2(1285,4472) ; R113.1@1650,5612.5 U2.3@1650,5750
  Bottom w25: v2(1285,4472) 1495,4472 1873,4850 1873,5419 1650,5642 U2.3@1650,5750 U2.3@1656,5744
NetR114_1: R114.1 R118.2 U2.5 | length 1813.6
  Top w25: R114.1@1850,5612.5 U2.5@1850,5750 ; v2(2365,4472) 2400,4437 R118.2@2400,4337.5
  Bottom w25: U2.5@1850,5750 1850,5712 1941,5621 1941,4835 2304,4472 v2(2365,4472)
NetR115_1: R115.1 R119.2 U2.7 | length 1777.8
  Top w25: R115.1@2050,5612.5 U2.7@2050,5750 ; R119.2@2550,4337.5 2550,4437 v2(2585,4472)
  Bottom w25: U2.7@2050,5750 2050,5705 2380,5375 2380,4757 2577,4560 v2@2577,4477
NetR133_2: R133.2 U5.4 | length 174.5
  Bottom w25: R133.2@3640,4957.5 3665,4932.5 3665,4850 3655,4840 U5.4@3655,4797.5
OUT-L_1: MCU1.30 R81.1 | length 1795.2
  Top w10: MCU1.30@1908.27,6806.5 1908.27,6690.77 2019.04,6580 2989,6580 3110,6459 3110,6240 3195,6155 R81.1@3195,6112.5
OUT-L_2: MCU1.31 R82.1 | length 1990.9
  Top w10: MCU1.31@1927.95,6806.5 1927.95,6696.54 2026.5,6598 2996.9,6598 3128,6466.9 3128,6272 3240,6160 R82.1@3240,5927.5
OUT-L_3: MCU1.32 R83.1 | length 1816.4
  Top w10: MCU1.32@1947.64,6806.5 1947.64,6702.32 2033.95,6616 3004.35,6616 3146,6474.35 3146,6299 3285,6160 R83.1@3285,6112.5
OUT-L_4: MCU1.33 R84.1 | length 2033.7
  Top w10: MCU1.33@2018.5,6877.36 2018.5,6704.5 2089,6634 3011.81,6634 3164,6481.81 3164,6326 3330,6160 R84.1@3330,5927.5
OUT-L_5: MCU1.34 R85.1 | length 1912.4
  Top w10: MCU1.34@2018.5,6897.05 2057.95,6897.05 2067,6888 2067,6686 2101,6652 3019.27,6652 3182,6489.26 3182,6338 3375,6145 R85.1@3375,6112.5 R85.1@3375,6107.5
OUT-L_6: MCU1.35 R86.1 | length 2154.1
  Top w10: MCU1.35@2018.5,6916.73 2067.27,6916.73 2085,6899 2085,6698 2113,6670 2196,6670 3026.72,6670 3200,6496.72 3200,6355 3375,6180 3410,6180 3420,6170 R86.1@3420,5927.5
OUT-L_7: MCU1.36 R87.1 | length 2016.9
  Top w10: MCU1.36@2018.5,6936.42 2019.28,6935.64 2073.82,6935.64 2103,6906.46 2103,6715 2130,6688 3034.18,6688 3218,6504.18 3218,6372 3385,6205 3440,6205 3465,6180 R87.1@3465,6112.5
OUT-L_8: MCU1.37 R88.1 | length 2245.7
  Top w10: MCU1.37@2018.5,6956.1 2083.9,6956.1 2121,6919 2121,6734 2149,6706 3041.63,6706 3236,6511.63 3236,6384 3390,6230 3455,6230 3510,6175 R88.1@3510,5927.5
OUT-L_9: MCU1.47 R30.1 | length 2447
  Top w10: MCU1.47@2018.5,7152.95 2065.95,7152.95 2076,7163 2076,7223 2095,7242 2146,7242 2172,7216 2172,7114 2186,7100 2200,7100 2279,7021 v1@2279,7016 ; v1@2246,6752 2274,6724 3049.09,6724 3254,6519.09 3254,6396 3400,6250 3470,6250 3555,6165 R30.1@3555,6112.5
  Bottom w10: v1(2250,6747) 2280,6777 v1(2280,7016)
OUT-L_10: MCU1.42 R31.1 | length 2313.1
  Top w10: MCU1.42@2018.5,7054.53 2086.47,7054.53 2127,7014 2166,7014 2182,6998 2182,6979 2237,6924 2237,6847 2342,6742 3056.54,6742 3272,6526.54 3272,6408 3410,6270 3495,6270 3600,6165 R31.1@3600,5927.5
OUT-L_11: MCU1.43 R32.1 | length 2171.6
  Top w10: MCU1.43@2018.5,7074.21 2094.79,7074.21 2137,7032 2176,7032 2200,7008 2200,6986.46 2258,6928.46 2258,6856 2354,6760 3064,6760 3290,6534 3290,6420 3420,6290 3510,6290 3645,6155 R32.1@3645,6112.5
OUT-L_12: MCU1.44 R77.1 | length 2415.2
  Top w10: MCU1.44@2018.5,7093.9 2104.1,7093.9 2145,7053 2184,7053 2222,7015 2222,6992 2277,6937 2277,6866 2362,6781 3072.26,6781 3311,6542.26 3311,6429 3430,6310 3545,6310 3690,6165 R77.1@3690,5927.5
PGC: CN10.5 MCU1.17 | length 2047.5
  Top w8: v2(20,6675) -20,6715 -20,6845 -1,6864 CN10.5@89.5,6864 ; v1(1619,6740) MCU1.17@1652.36,6773.36
  Bottom w8: v2(20,6675) 500,6675 650,6825 1534,6825 v1(1619,6740)
PGD: CN10.4 MCU1.18 | length 1623.2
  Top w8: v1(1664,6722) 1672.05,6730.05 MCU1.18@1672.05,6806.5
  Top w12: CN10.4@284.5,6964 419,6964 425,6970 v1(425,6990)
  Bottom w8: v1(425,6990) 425,6970 430,6975 575,6975 675,6875 1481,6875 1515,6841 1556.18,6841 1664,6733.18 v1(1664,6722)
R\E\S\E\T\: CN10.1 MCU1.7 R90.1 | length 2714.2
  Top w8: R90.1@547.5,7560 557.5,7570 820,7570 v1(840,7550) ; v1(1320,6919) 1455.53,7054.53 MCU1.7@1581.5,7054.53
  Top w12: CN10.1@89.5,7064 89.5,7099.5 130,7140 290,7140 390,7240 390,7570 440,7620 530,7620 547.5,7602.5 R90.1@547.5,7570 R90.1@547.5,7560
  Bottom w8: v1@835,7555 v1(840,7550) 840,6922 871,6891 1292,6891 v1(1320,6919)
SW_1: MCU1.48 R96.1 SW101.16 | length 720.6
  Top w8: MCU1.48@2018.5,7172.64 2018.5,7205.5 2093,7280 2448,7280 v1@2477,7309 ; SW101.16@2477,7404 v1@2477,7309 ; v1(2478,7308) v1@2477,7309
  Bottom w8: v1(2478,7308) 2478,7396.5 R96.1@2479,7397.5
SW_2: MCU1.49 R97.1 SW101.15 | length 1024
  Top w8: MCU1.49@1947.64,7243.5 1947.64,7302.64 2131,7486 2562,7486 2577,7471 SW101.15@2577,7404 2577,7309 v1(2578,7308)
  Bottom w8: v1(2578,7308) 2578,7396.5 R97.1@2579,7397.5
SW_3: MCU1.50 R98.1 SW101.14 | length 1154.6
  Top w8: MCU1.50@1927.95,7243.5 1927.95,7305.58 2124.37,7502 2639,7502 2677,7464 SW101.14@2677,7404 2677,7309 v1(2678,7308)
  Bottom w8: v1(2678,7308) 2678,7396.5 R98.1@2679,7397.5
SW_4: MCU1.51 R99.1 SW101.13 | length 1288
  Top w8: MCU1.51@1908.27,7243.5 1908.27,7308.52 2117.75,7518 2721,7518 2777,7462 SW101.13@2777,7404 2777,7309 v1(2778,7308)
  Bottom w8: v1(2778,7308) 2778,7396.5 R99.1@2779,7397.5
SW_5: MCU1.52 R73.1 SW101.12 | length 1419.5
  Top w8: MCU1.52@1888.58,7243.5 1888.58,7311.46 2111.12,7534 2802,7534 2877,7459 SW101.12@2877,7404 2877,7309 v1(2878,7308)
  Bottom w8: v1(2878,7308) R73.1@2878,7396.5
SW_6: MCU1.53 R74.1 SW101.11 | length 1558.3
  Top w8: MCU1.53@1868.9,7243.5 1868.9,7314.41 2104.49,7550 2893,7550 2977,7466 SW101.11@2977,7404 v1@2977,7309
  Bottom w8: v1(2978,7308) 2979,7309 R74.1@2979,7397.5
SW_7: MCU1.54 R75.1 SW101.10 | length 1692.8
  Top w8: MCU1.54@1849.21,7243.5 1849.21,7317.35 2097.86,7566 2975,7566 3074,7467 3074,7407 SW101.10@3077,7404 3077,7309 v1(3078,7308)
  Bottom w8: v1(3078,7308) R75.1@3078,7397.5
SW_8: MCU1.55 R76.1 SW101.9 | length 1830.8
  Top w8: MCU1.55@1829.53,7243.5 1829.53,7320.29 2091.24,7582 3065,7582 3178,7469 3178,7405 SW101.9@3177,7404 3177,7309 v1(3178,7308)
  Bottom w8: v1(3178,7308) R76.1@3178,7396.5
pads on no net: CN5.paste CN10.6 CN10.7 CN10.8 FD0.FD FD1.FD FD2.FD FD3.FD IC1.1 IC1.4 IC1.7 IC2.1 IC2.4 IC2.7 IC3.5 J1.p1 J2.p1 J3.p1 J4.p1 J5.0 J5.1@2183,6878 LCD1.1 LCD1.30 LCD1.31 LCD1.32 MCU1.58 MCU1.59 MCU1.62 MCU1.63 MCU1.64 MTH1.MntHole MTH2.MntHole MTH3.MntHole MTH4.MntHole SW22.5 SW22.6 TX1.10 U4.3 U4.5 U4.6 U4.7 U4.8 U5.5 XU1.1 XU2.1 XU3.1 XU6A.1 XU7.1 XU8.1 XU9.1 XU10.1 XU11.1

## Polygon pours and split planes (outlines as drawn)
0V on Bottom "mask" (solid, remove dead copper, pour order 1001): 0,7550 0,3000 450,3000 450,3550 700,3600 1400,3600 1850,3150 1850,2850 2250,2850 2250,3600 3300,3600 3350,3550 3350,3000 3700,3000 3700,7550
0V on Top "mask" (solid, remove dead copper, pour order 1000): 0,7550 0,3000 400,3000 400,5900 3400,5900 3400,3000 3700,3000 3700,7550

## Keep-outs
Board:
  the board outline again, w10

## Other copper
Bottom:
  text "PCB-1109N" at 1870,7520 h120
  text "BOTTOM" at 3705,7105 h100 r270

## Silkscreen, mask and mechanical layers (free items; w line width, h text height)
Top Silk:
  drawing of 185 lines, arcs and shapes, not listed
  text "+5V" at 810,7255 h90 r90
  text "MCU" at 810,6960 h90 r90
  text "1" at 2505,6925 h90 r90
  text "2" at 2605,6920 h90 r90
  text "8" at 2805,6920 h75 r90
  text "4" at 2705,6915 h90 r90
  text "16" at 2905,6900 h90 r90
  text "32" at 3010,6900 h90 r90
  text "FLIP" at 3105,6875 h75 r90
  text "AUX" at 3195,6870 h75 r90
  text "PIN39" at 2249,6866 h45
  text "0V" at 2160,6681 h45
  text "COMM" at 810,6660 h90 r90
  text "IN1" at 550,6125 h90
  text "IN2" at 750,6125 h90
  text "IN3" at 950,6125 h90
  text "IN4" at 1150,6125 h90
  text "IN5" at 1450,6125 h90
  text "IN6" at 1650,6125 h90
  text "IN7" at 1850,6125 h90
  text "IN8" at 2050,6125 h90
  text "IN9" at 2350,6125 h90
  text "IN10" at 2525,6125 h90
  text "IN11" at 2725,6125 h90
  text "IN12" at 2925,6125 h90
  text "BUS" at 200,6026 h80
  text "TERM" at 172,5962 h80
  text "24V AC/DC I/O EXPANDER" at 76,5037 h120 r90
  text "GALX4-0047N" at 173,5037 h120 r90
  text "REV: A" at 277,5037 h120 r90
  text "L" at 128.63,4921.64 h83.88 r90
  text "A" at 128.63,4823.79 h83.88 r90
  text "G" at 128.63,4732.92 h83.88 r90
  text "www.gal.com" at 257.94,4701.47 h55.92 r90
  text "MADE IN USA" at 315,4679.93 h60 r90
  text "OUT1" at 575,4675 h100 r90
  text "OUT2" at 775,4675 h100 r90
  text "OUT3" at 1075,4675 h100 r90
  text "OUT4" at 1275,4675 h100 r90
  text "OUT5" at 1575,4675 h100 r90
  text "OUT6" at 1775,4675 h100 r90
  text "OUT7" at 2075,4675 h100 r90
  text "OUT8" at 2275,4675 h100 r90
  text "OUT9" at 2575,4675 h100 r90
  text "OUT10" at 2775,4650 h100 r90
  text "OUT11" at 3075,4650 h100 r90
  text "OUT12" at 3275,4650 h100 r90
  text "INFO" at 173,4514 h80 r90
  text "CAN" at 3552,4194 h80 r90
  text "ENABLE" at 3639,4139 h80 r90
  text "RISE" at 3400,3905 h80 r90
  text "HIGH" at 3321,3903 h80 r90
  text "C2L" at 452,3664 h80 r90
  text "C2L" at 3301,3663 h80 r90
  text "C2H" at 382,3550 h80
  text "C2H" at 3204,3548 h65
  text "+5V" at 3196,3401 h80
  text "+5V" at 386,3398 h80
  text "+5V" at 3188,3253 h80
  text "+5V" at 388,3250 h80
  text "0V" at 3218,3109 h80
  text "0V" at 403,3094 h80
  text "0V" at 396,2954 h80
  text "0V" at 3222,2949 h80
  text "24V" at 3204,2845 h65
  text "24V" at 402,2844 h65
  text "AC/DC" at 3194,2784 h45
  text "AC/DC" at 392,2783 h45
  text "24CM" at 3176,2692 h65
  text "24CM" at 374,2691 h65
  text "AC/DC" at 3189,2620 h45
  text "AC/DC" at 387,2619 h45
  text "120V" at 391,2542 h65
  text "120V" at 3183,2537 h65
  text "LINE" at 392,2475 h65
  text "LINE" at 3184,2470 h65
  text "120V" at 386,2386 h65
  text "120V" at 3183,2384 h65
  text "NEUT." at 376,2322 h65
  text "NEUT." at 3173,2320 h65
  text "2" at 439,1701 h100
  text "4" at 1048.07,1701.28 h100
  text "6" at 1657.06,1701 h100
  text "8" at 2266.04,1701 h100
  text "10" at 2875.02,1701 h100
  text "12" at 3484,1701 h100
  text "ON" at 660,1568 h55 r90
  text "ON" at 1274,1568 h55 r90
  text "ON" at 1889,1568 h55 r90
  text "ON" at 2506,1568 h55 r90
  text "ON" at 3121,1568 h55 r90
  text "ON" at 3737,1568 h55 r90
  text "MON." at 658,1319 h55 r90
  text "MON." at 1272,1319 h55 r90
  text "MON." at 1887,1319 h55 r90
  text "MON." at 2504,1319 h55 r90
  text "MON." at 3119,1319 h55 r90
  text "MON." at 3735,1319 h55 r90
  text "3" at 760.8,1186 h100
  text "5" at 1369.6,1186 h100
  text "9" at 2587.2,1186 h100
  text "1" at 152,1184.89 h100
  text "7" at 1978.4,1184.89 h100
  text "11" at 3196,1184.89 h100
  text "ON" at 969,1060 h55 r90
  text "ON" at 1585,1060 h55 r90
  text "ON" at 355,1059 h55 r90
  text "ON" at 2200,1059 h55 r90
  text "ON" at 2815,1059 h55 r90
  text "ON" at 3432,1059 h55 r90
  text "MON." at 967,811 h55 r90
  text "MON." at 1583,811 h55 r90
  text "MON." at 353,810 h55 r90
  text "MON." at 2198,810 h55 r90
  text "MON." at 2813,810 h55 r90
  text "MON." at 3430,810 h55 r90
  text "IN" at 588,102 h60 r30
  text "U1" at 726.65,81 h80
  text "U1" at 923.5,81 h80
  text "U1" at 1120.35,81 h80
  text "U1" at 1317.2,81 h80
  text "U2" at 1514.05,81 h80
  text "U2" at 1710.9,81 h80
  text "U2" at 1907.75,81 h80
  text "U2" at 2104.6,81 h80
  text "U3" at 2301.45,81 h80
  text "U3" at 2498.3,81 h80
  text "U3" at 2695.15,81 h80
  text "U3" at 2892,81 h80
  text "MAP" at 509,11 h55 r90
  text "I/O CHIP" at 455,-42 h55 r90
  text "U6" at 726.65,-44 h80
  text "U6" at 927.05,-44 h80
  text "U7" at 1123.9,-44 h80
  text "U7" at 1320.75,-44 h80
  text "U8" at 1517.6,-44 h80
  text "U8" at 1714.45,-44 h80
  text "U9" at 1911.3,-44 h80
  text "U9" at 2108.15,-44 h80
  text "U10" at 2279,-44 h80
  text "U10" at 2480,-44 h80
  text "U11" at 2680,-44 h80
  text "U11" at 2878,-44 h80
  text "OUT" at 560,-50 h60 r30
Bot Silk:
  text "FD0" at 150,-75 h60
TITLE:
  lines w1: 4778,5940 4778,4040 8378,4040 8378,6140 ; 6478,4040 6478,6140 ; 8378,4364 4778,4364 4778,4664 8378,4664 8378,4964 4778,4964 4778,5264 8378,5264 8378,5564 4778,5564 4778,5864 ; 8378,5864 4778,5864 ; 8378,6164 4778,6164 4778,5864
  text "24V AC/DC I/O EXPANDER" at 4788,7038 h180
  text "GALX4-0047N REV: A" at 4788,6838 h180
  text "PCB-1109N" at 4788,6638 h180
  text "ST-1099N" at 4787,6461 h180
  text "03/16/16" at 4793,6234 h180
  text "FABRICATION SPECIFICATION" at 4890.5,5976 h76
  text "IPC-A-600 CLASS II" at 6590.5,5976 h76
  text "BOARD DIMENSIONS" at 4890.5,5676 h76
  text "3.900W x 7.750\"H x 0.062\"T" at 6590.5,5676 h76
  text "COPPER THICKNESS" at 4890.5,5376 h76
  text "2 OUNCE" at 6590.5,5376 h76
  text "NUMBER OF LAYERS" at 4890.5,5076 h76
  text "2 W/ P.T.H." at 6590.5,5076 h76
  text "SOLDER MASK" at 4890.5,4776 h76
  text "GREEN LPI OVER COPPER" at 6590.5,4776 h76
  text "SILK SCREEN" at 4890.5,4476 h76
  text "WHITE NON-CONDUCTIVE" at 6590.5,4476 h76
  text "2 boards per panel" at 6582.5,4202 h120
  text "Pannel Dimensions" at 4899.5,4187 h120
Drill Drawing:
  text ".Legend" at 4831,2100 h60

## Dimensions
-100,-100 to -100,7650 on TITLE
-100,-100 to 3800,-100 on TITLE

## Text inside footprints (layer, text, board x,y; h text height)
C26: Top Silk "+" at 334.15,6601.28 h42.56 r180
C27: Bot Silk "+" at 128.72,5715.85 h42.56 r270
C46: Bot Silk "+" at 2211.28,3994.15 h42.56 r90
C51: Bot Silk "+" at 2928.72,6110.85 h42.56 r270